# Altium PCB PCB1.PcbDoc
Units mm, origin at the board's own origin, x right, y up, seen from the top; angles counter-clockwise.
Board outline 100 x 100 mm, 2 copper layers (Top Layer, Bottom Layer); 92 components, 60 nets, 300 pads, 62 vias.
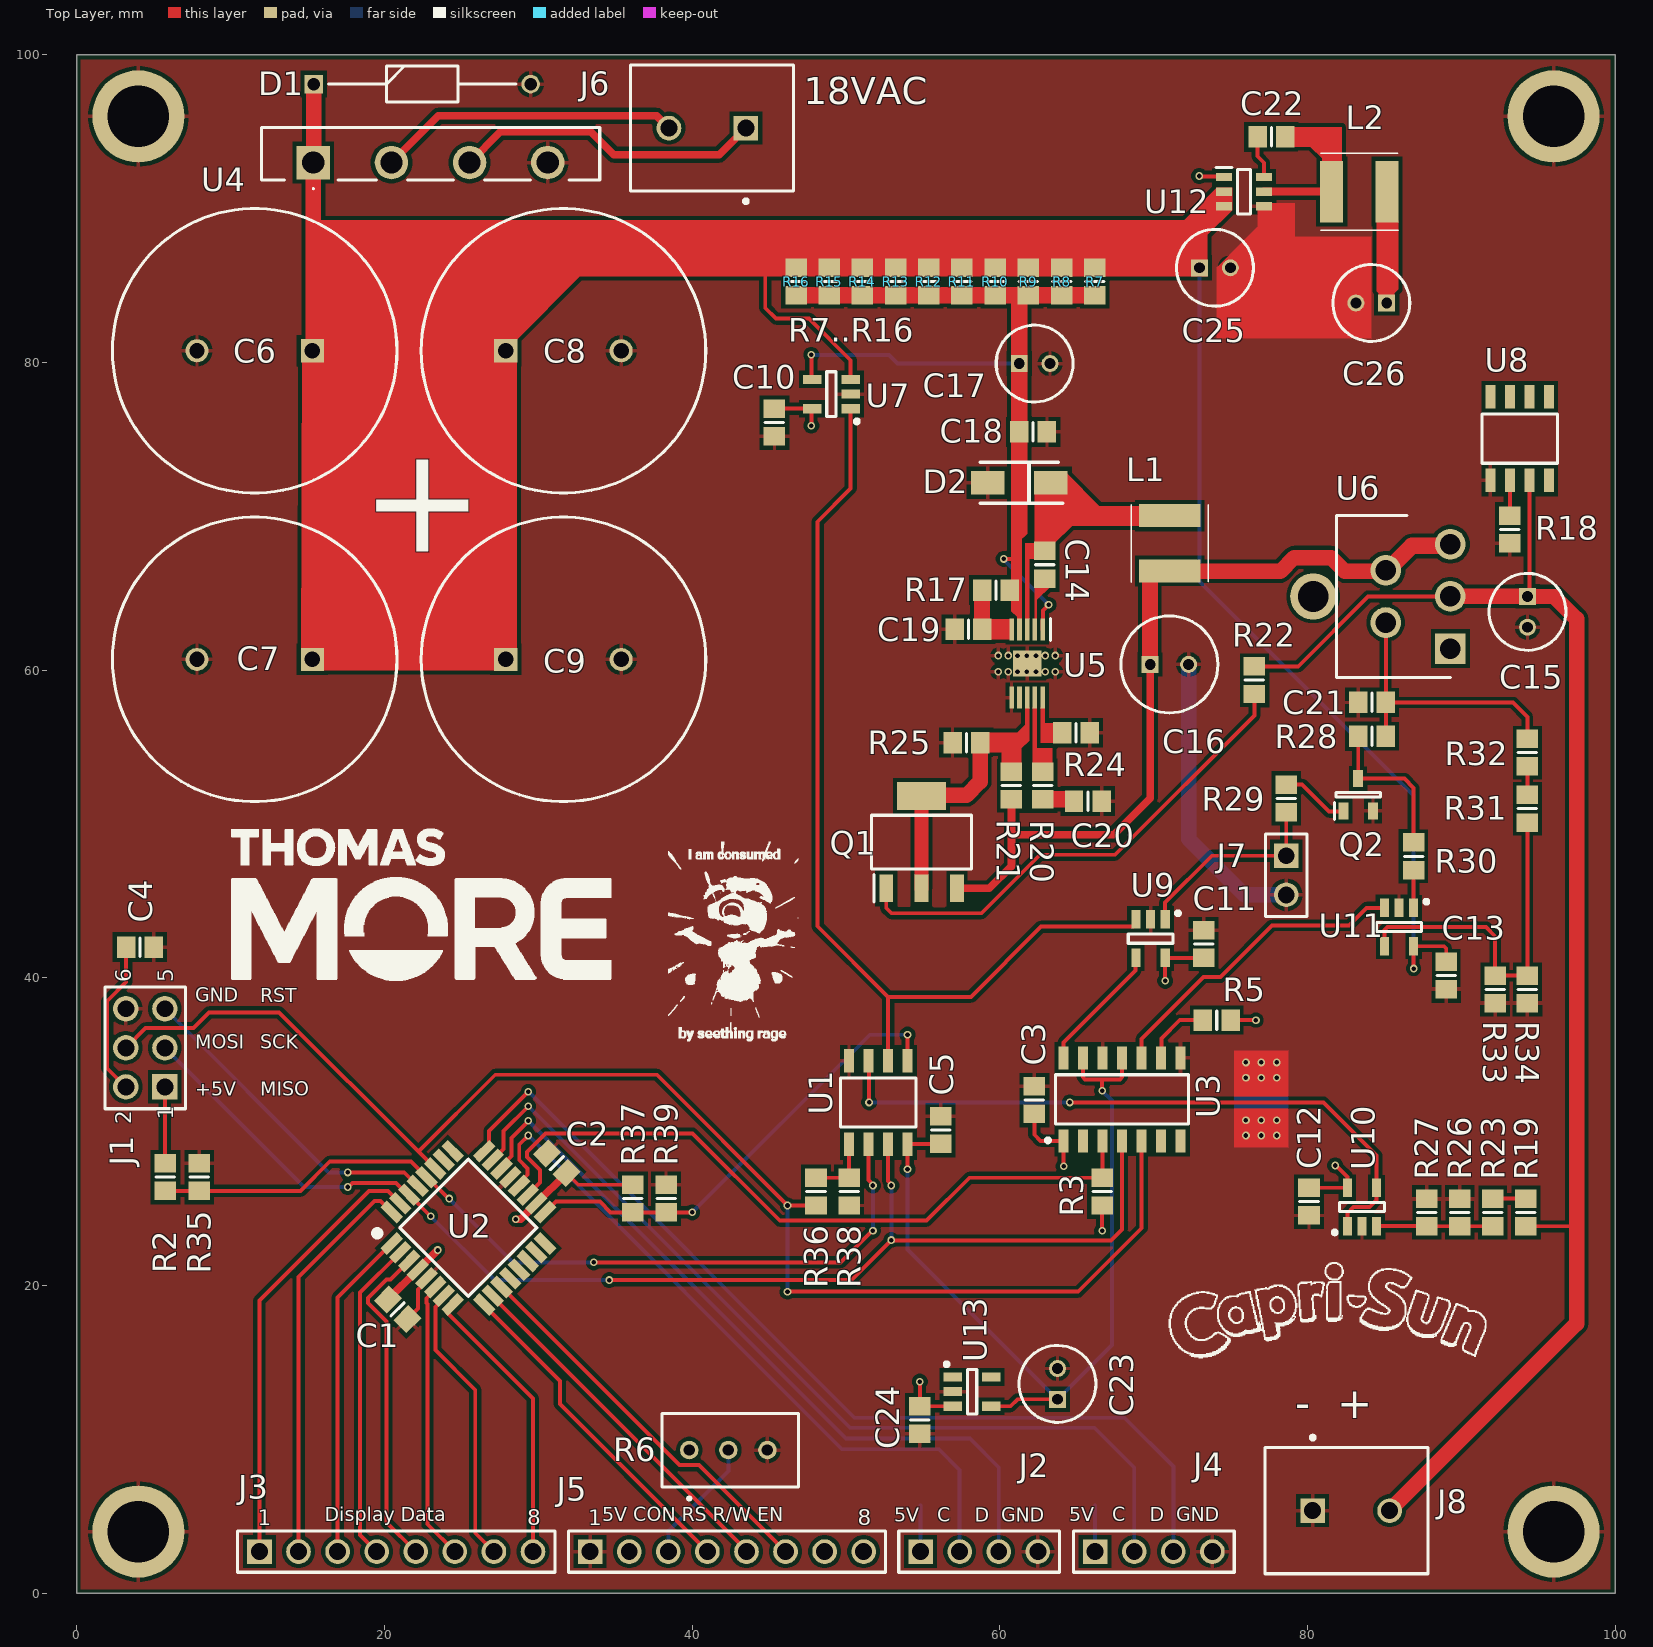
[diagram p0: Top Layer view]
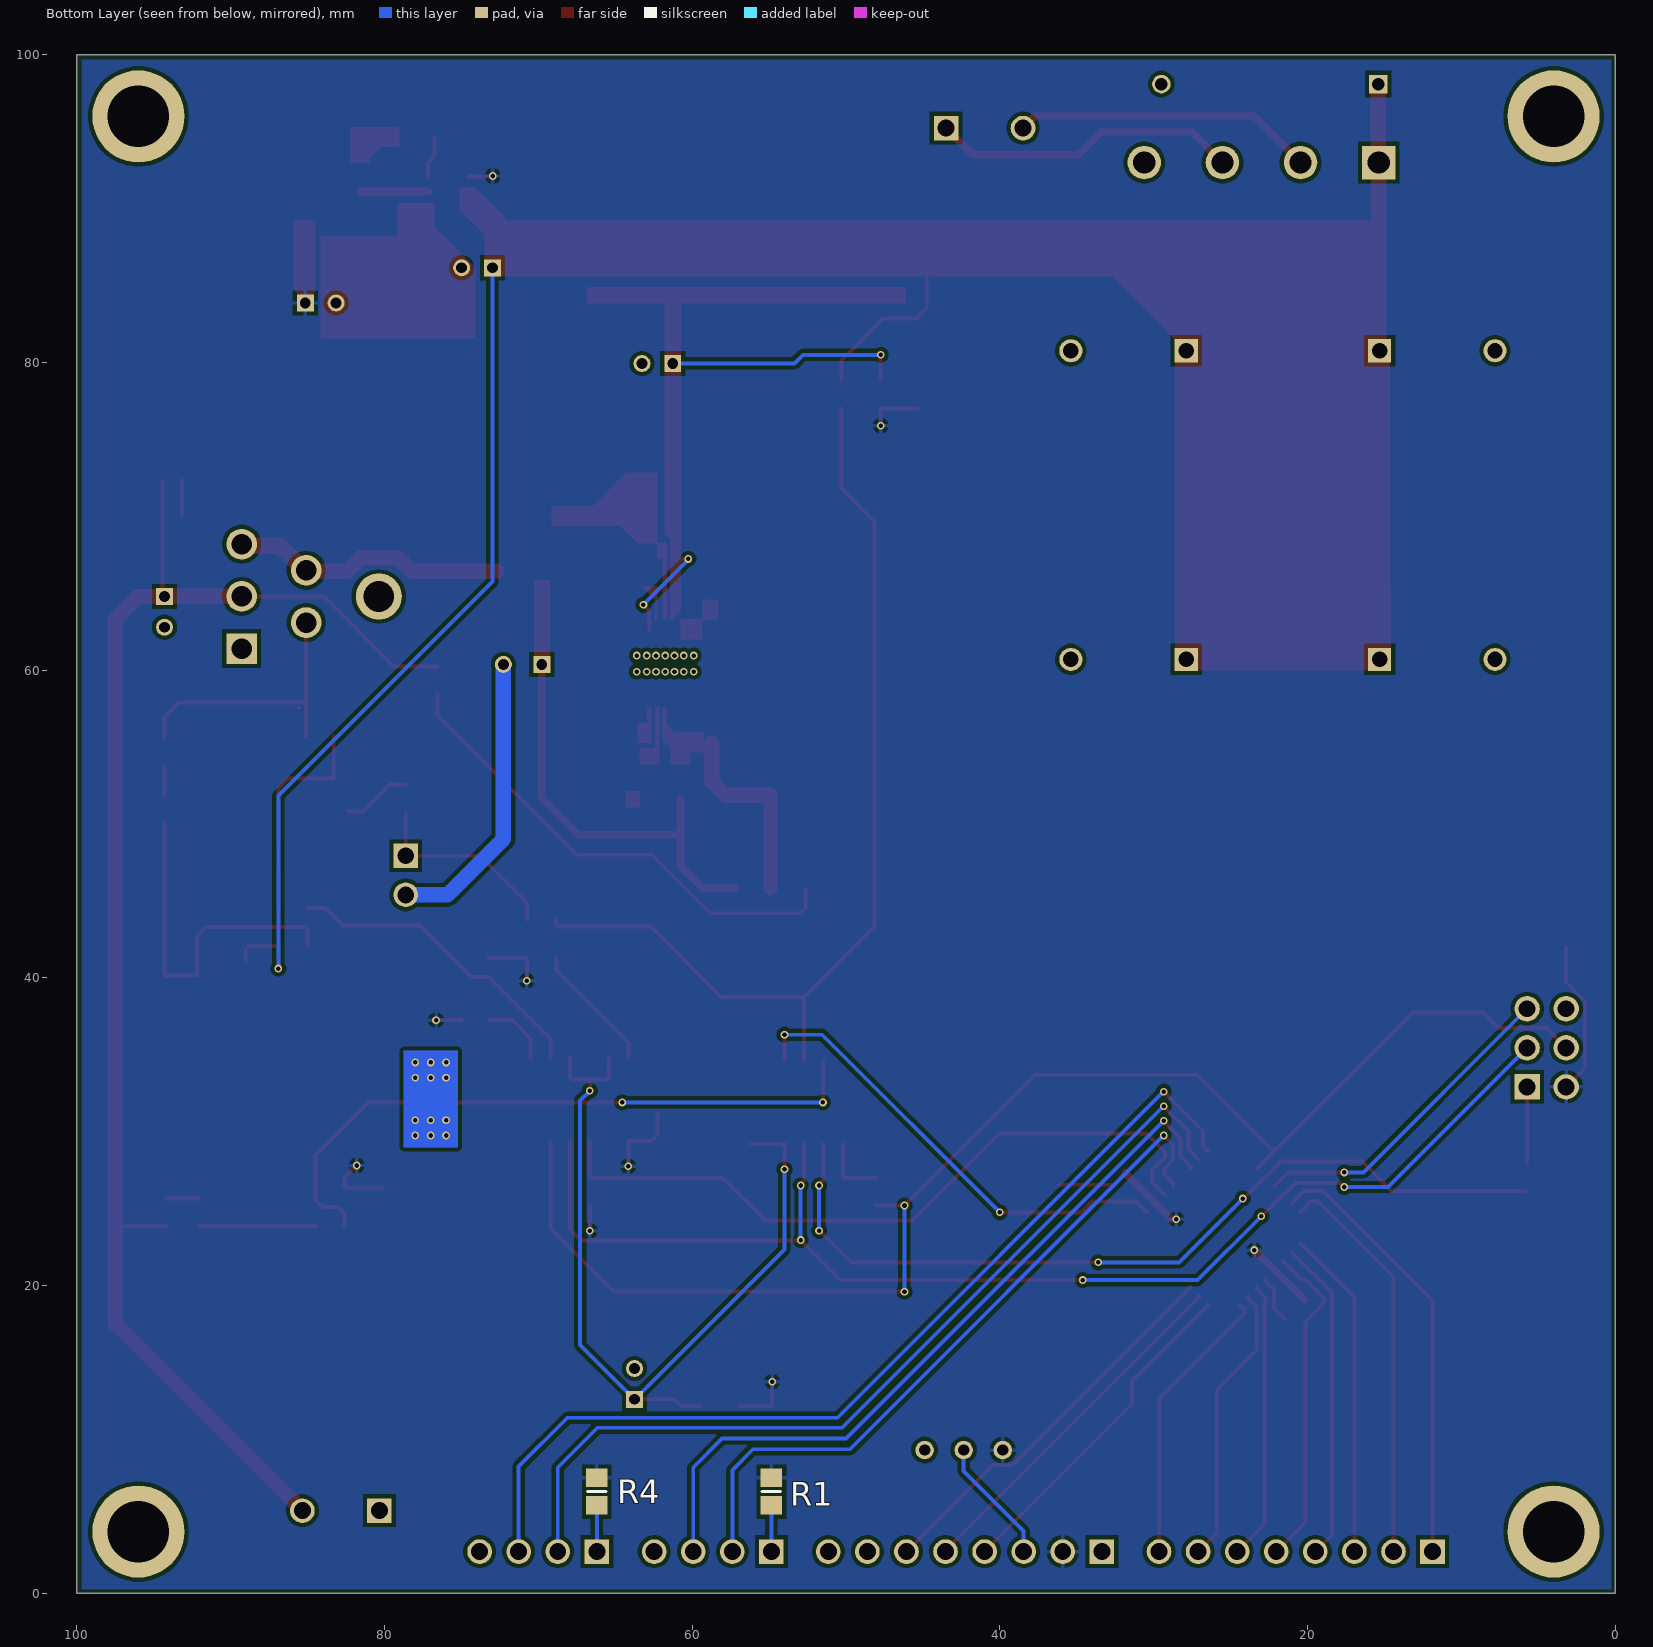
[diagram p1: Bottom Layer view, seen from below]

## Layer stack, top to bottom
Top Solder: solder mask 0.0102, Solder Resist, Dk 3.5
Top Layer: signal copper 0.0356
Dielectric 1: dielectric 0.32, FR-4, Dk 4.8
Bottom Layer: signal copper 0.0356
Bottom Solder: solder mask 0.0102, Solder Resist, Dk 3.5

## Board outline
0,0 0,100 100,100 100,0

## Design rules (kind name [scope] priority, off if disabled: settings)
Clearance [All] p1: gap=0.254 ignorepadtopadclearanceinfootprint=FALSE except(0: Arc-Hole Track-Hole SMDPad-Hole THPad-Hole Via-Hole Fill-Hole Poly-Hole Region-Hole Text-Hole)
HoleSize [All] p1: absolutevalues=TRUE maxlimit=6.3 minlimit=0.3 maxpercent=80.000 minpercent=20.000
PolygonConnect [All] p1: connectstyle=Relief reliefconductorwidth=0.254 reliefentries=4 polygonreliefangle="90 Angle" airgapwidth=0.254
RoutingVias [All] p1: holewidth=0.711 width=1.27 viastyle="Through Hole" minholewidth=0.711 minwidth=1.27 maxholewidth=0.711 maxwidth=1.27
SolderMaskExpansion [All] p1: expansion=0.102 istentingtop=FALSE
Width [All] p1: maxlimit=0.254 minlimit=0.254 preferedwidth=0.254
29 further rules are at their usual default settings.

## Classes and differential pairs
component class 2_PSU: C6 C7 C8 C9 C10 C11 C12 C13 C14 C15 C16 C17 C18 C19 C20 C21 C22 C23 C24 C25 C26 D1 D2 J6 J7 J8 L1 L2 Q1 Q2 R7 R8 R9 R10 R11 R12 R13 R14 R15 R16 R17 R18 R19 R20 R21 R22 R23 R24 R25 R26 R27 R28 R29 R30 R31 R32 R33 R34 U4 U5 U6 U7 U8 U9 U10 U11 U12 U13
component class 1_Controller: C1 C2 C3 C4 C5 J1 J2 J3 J4 J5 R1 R2 R3 R4 R5 R6 R35 R36 R37 R38 R39 U1 U2 U3

## Components (designator, comment, footprint, x,y, rotation, side; value= is the part's Value field where it differs from the comment)
C1 "Capacitor" 6-0805_N 20.85,18.45 r135 top value=100n
C2 "Capacitor" 6-0805_N 31.2,27.95 r315 top value=100n
C3 "Capacitor" 6-0805_N 62.25,32.05 r270 top value=100n
C4 "Capacitor" 6-0805_N 4.1,42 r180 top value=100n
C5 "Capacitor" 6-0805_N 56.15,30.1 r270 top value=100n
C6 "Cap Pol1" CAPPRD750W80D1850H4150 15.308,80.765 r180 top value=4700u
C7 "Cap Pol1" CAPPRD750W80D1850H4150 15.308,60.699 r180 top value=4700u
C8 "Cap Pol1" CAPPRD750W80D1850H4150 27.881,80.765 r0 top value=4700u
C9 "Cap Pol1" CAPPRD750W80D1850H4150 27.881,60.699 r0 top value=4700u
C10 "Capacitor" 6-0805_N 45.35,76.1 r90 top value=100n
C11 "Capacitor" 6-0805_N 73.25,42.2 r270 top value=100n
C12 "Capacitor" 6-0805_N 80.1,25.45 r90 top value=100n
C13 "Capacitor" 6-0805_N 89.025,40.146 r90 top value=100n
C14 "Capacitor" 6-0805_N 62.916,66.852 r270 top value=0.47u
C15 "Cap Pol1" CAPPRD200W52D500H1250 94.304,64.792 r270 top value=10u
C16 "Cap Pol1" CAPPRD250W52D630H1100 69.774,60.375 r0 top value=68u
C17 "Cap Pol1" CAPPRD200W52D500H1250 61.265,79.933 r0 top value=10u
C18 "Capacitor" 6-0805_N 62.165,75.488 r180 top value=1u
C19 "Capacitor" 6-0805_N 57.963,62.661 r0 top value=100n
C20 "Capacitor" 6-0805_N 65.721,51.485 r180 top value=680p
C21 "Capacitor" 6-0805_N 84.2,57.9 r0 top value=100n
C22 "Capacitor" 6-0805_N 77.656,94.667 r180 top value=100n
C23 "Cap Pol1" CAPPRD200W52D500H1250 63.75,12.6 r90 top value=10u
C24 "Capacitor" 6-0805_N 54.8,11.25 r90 top value=100n
C25 "Cap Pol1" CAPPRD200W52D500H1250 72.989,86.158 r0 top value=10u
C26 "Cap Pol1" CAPPRD200W52D500H1250 85.149,83.872 r180 top value=47u
D1 "1N4007" DIOAD1405W58L465D235 15.4,98.1 r0 top
D2 "B340A" DIOM5127X229N 61.265,72.186 r180 top
J1 "61300621121" 61300621121 4.45,35.45 r90 top
J2 "61300411121" 61300411121 58.66,2.7 r0 top
J3 "61300811121" 61300811121 20.76,2.7 r0 top
J4 "61300411121" 61300411121 70.01,2.7 r0 top
J5 "61300811121" 61300811121 42.26,2.7 r0 top
J6 "282836-2" TECO-282836-2_V 40.99,95.24 r180 top
J7 "LED_Header" 61300211121 78.623,46.666 r270 top
J8 "282836-2" TECO-282836-2_V 82.839,5.361 r0 top
L1 "4.7u" VLS5045EX330M 71.044,68.249 r270 top
L2 "4.7u" VLS5045EX330M 83.371,91.111 r0 top
Q1 "ZVP4525GTA" SOT230P700X180-4N 54.915,48.818 r90 top
Q2 "MMBT3904-7-F" SOT96P240X110-3N 83.3,51.9 r90 top
R1 "Resistor" 6-0805_N 54.85,6.6 r90 bottom value=10k
R2 "Resistor" 6-0805_N 5.75,27.05 r270 top value=15.4k
R3 "Resistor" 6-0805_N 66.65,26.1 r270 top value=10k
R4 "Resistor" 6-0805_N 66.2,6.6 r90 bottom value=10k
R5 "Resistor" 6-0805_N 74.1,37.25 r0 top value=10k
R6 "10k" PV36W201C01B00 39.81,9.3 r270 top
R7 "Resistor" 6-0805_N 66.175,85.267 r270 top value=1R
R8 "Resistor" 6-0805_N 64.027,85.267 r270 top value=1R
R9 "Resistor" 6-0805_N 61.857,85.267 r270 top value=1R
R10 "Resistor" 6-0805_N 59.698,85.267 r270 top value=1R
R11 "Resistor" 6-0805_N 57.539,85.267 r270 top value=1R
R12 "Resistor" 6-0805_N 55.38,85.267 r270 top value=1R
R13 "Resistor" 6-0805_N 53.221,85.267 r270 top value=1R
R14 "Resistor" 6-0805_N 51.062,85.267 r270 top value=1R
R15 "Resistor" 6-0805_N 48.903,85.267 r270 top value=1R
R16 "Resistor" 6-0805_N 46.755,85.267 r270 top value=1R
R17 "Resistor" 6-0805_N 59.752,65.201 r0 top value=100k
R18 "Resistor" 6-0805_N 93.15,69.15 r90 top value=68R
R19 "Resistor" 6-0805_N 94.2,24.75 r270 top value=39k
R20 "Resistor" 6-0805_N 62.789,52.501 r90 top value=15.4k
R21 "Resistor" 6-0805_N 60.757,52.501 r270 top value=330k
R22 "Resistor" 6-0805_N 76.55,59.35 r270 top value=10k
R23 "Resistor" 6-0805_N 92.05,24.75 r90 top value=39k
R24 "Resistor" 6-0805_N 64.948,55.93 r180 top value=63.4k
R25 "Resistor" 6-0805_N 57.825,55.295 r0 top value=10k
R26 "Resistor" 6-0805_N 89.9,24.75 r270 top value=39k
R27 "Resistor" 6-0805_N 87.75,24.75 r270 top value=39k
R28 "Resistor" 6-0805_N 84.2,55.7 r0 top value=100R
R29 "Resistor" 6-0805_N 78.623,51.666 r90 top value=10k
R30 "Resistor" 6-0805_N 86.9,47.9 r90 top value=1K
R31 "Resistor" 6-0805_N 94.296,50.996 r270 top value=39k
R32 "Resistor" 6-0805_N 94.296,54.646 r270 top value=39k
R33 "Resistor" 6-0805_N 92.196,39.246 r90 top value=39k
R34 "Resistor" 6-0805_N 94.296,39.246 r90 top value=39k
R35 "Resistor" 6-0805_N 7.95,27.05 r270 top value=63.4k
R36 "Resistor" 6-0805_N 48.05,26.1 r270 top value=15.4k
R37 "Resistor" 6-0805_N 36.15,25.65 r270 top value=15.4k
R38 "Resistor" 6-0805_N 50.2,26.1 r90 top value=63.4k
R39 "Resistor" 6-0805_N 38.3,25.65 r270 top value=63.4k
U1 "MCP3202-BI_SN" SOIC127P600X175-8N 52.1,31.9 r270 top
U2 "ATtiny828" QFP80P900X900X120-32N 25.45,23.75 r45 top
U3 "MCP4922T-E_SL" SOIC127P600X175-14N 67.95,32.1 r90 top
U4 "GBU1010_T0_00601" GBU1010_T0_00601 15.37,93 r180 top
U5 "LT3680EMSE#PBF" SOP50P490X110-11N 61.781,60.428 r270 top
U6 "LT3083ET#PBF" TO170P457X1022X2306-5P 89.289,61.395 r90 top
U7 "INA180-Q1" SOT95P280X145-5N#1 49.05,77.95 r180 top
U8 "LM334SMX_NOPB" SOIC127P600X175-8N 93.8,75.05 r90 top
U9 "TS321ILT" SOT95P280X145-5N#1 69.8,42.55 r270 top
U10 "TS321ILT" SOT95P280X145-5N#1 83.546,25.104 r90 top
U11 "TS321ILT" SOT95P280X145-5N#1 85.95,43.3 r270 top
U12 "AP63205WU-7" SOT95P280X100-6N 75.878,91.111 r0 top
U13 "REF3440SQDBVRQ1" SOT95P280X145-5N#2 58.2,13.1 r0 top

## Footprints (in the part's own frame and the unit in brackets; to place one, negate y for a bottom-side part, rotate by r counter-clockwise, add the part's x,y. Pads: shape width x height; smd on the part's side, far side on the other; paste and mask are expansions set on the pad)
6-0805_N [mm] "Chip Resistor, Body 2.0x1.2mm, IPC Medium Density"
  rect 1.2x1.4 smd: 1(-0.9,0) 2(0.9,0)
  silkscreen extent 0,-0.6 0,0.6, body extent -1.07,-0.7 1.07,0.7, height 0.7
61300211121 [mm] "Pin Header, pitch 2.54 mm, THT, Vertical, single row, 2p"
  rect 1.6x1.6 hole 1.1: 1(-1.27,0)
  round 1.6 hole 1.1: 2(1.27,0)
  silkscreen extent -2.69,-1.35 2.69,1.35, body extent -2.54,-1.27 2.54,1.27, height 8.57
61300411121 [mm] "Pin Header, pitch 2.54 mm, THT, Vertical, single row, 4p"
  rect 1.6x1.6 hole 1.1: 1(-3.81,0)
  round 1.6 hole 1.1: 2(-1.27,0) 3(1.27,0) 4(3.81,0)
  silkscreen extent -5.23,-1.35 5.23,1.35, body extent -5.08,-1.27 5.08,1.27, height 8.57
61300621121 [mm] "Pin Header, pitch 2.54 mm, THT, Vertical, dual row, 6p"
  rect 1.65x1.65 hole 1.1: 1(-2.54,-1.27)
  round 1.65 hole 1.1: 2(-2.54,1.27) 3(0,-1.27) 4(0,1.27) 5(2.54,-1.27) 6(2.54,1.27)
  silkscreen extent -3.96,-2.62 3.96,2.62, body extent -3.81,-2.54 3.81,2.54, height 8.59
61300811121 [mm] "Pin Header, pitch 2.54 mm, THT, Vertical, single row, 8p"
  rect 1.6x1.6 hole 1.1: 1(-8.89,0)
  round 1.6 hole 1.1: 2(-6.35,0) 3(-3.81,0) 4(-1.27,0) 5(1.27,0) 6(3.81,0) 7(6.35,0) 8(8.89,0)
  silkscreen extent -10.31,-1.35 10.31,1.35, body extent -10.16,-1.27 10.16,1.27, height 8.57
CAPPRD200W52D500H1250 [mm]
  rect 1.1x1.1 hole 0.7: 1(0,0)
  round 1.1 hole 0.7: 2(2,0)
  silkscreen extent -1.5,-2.5 3.5,2.5, body extent -1.74,-2.75 3.75,2.75, height 12.5
CAPPRD250W52D630H1100 [mm]
  rect 1.1x1.1 hole 0.7: 1(0,0)
  round 1.1 hole 0.7: 2(2.5,0)
  silkscreen extent -1.9,-3.15 4.4,3.15, body extent -2.14,-3.4 4.65,3.4, height 11
CAPPRD750W80D1850H4150 [mm]
  rect 1.5x1.5 hole 1: 1(0,0)
  round 1.5 hole 1: 2(7.5,0)
  silkscreen extent -5.5,-9.25 13,9.25, body extent -5.48,-9.24 13,9.24, height 41.5
DIOAD1405W58L465D235 [mm]
  rect 1.2x1.2 hole 0.8: 1(0,0)
  round 1.2 hole 0.8: 2(14.1,0)
  silkscreen extent 0.95,-1.17 13.15,1.17, body extent -0.29,-1.34 14.34,1.34, height 2.7
DIOM5127X229N [mm]
  rect 2.2x1.55 smd: 1(-2.05,0) 2(2.05,0)
  silkscreen extent -2.83,-1.33 2.55,1.33, body extent -2.55,-1.33 2.55,1.33, height 2.29
GBU1010_T0_00601 [mm]
  rect 2.175x2.175 hole 1.45: 1(0,0)
  round 2.175 hole 1.45: 2(-5.08,0) 3(-10.16,0) 4(-15.24,0)
  silkscreen extent -18.62,-2.27 3.38,1.75, body extent -18.62,-2.27 3.38,1.13, height 21.65
PV36W201C01B00 [mm]
  round 1.2 hole 0.74: 1(0,0) 2(0,2.54) 3(0,5.08)
  silkscreen extent -2.39,-1.78 3.25,7.11, body extent -2.39,-1.78 2.41,7.11, height 10.13
QFP80P900X900X120-32N [mm]
  rect 1.5x0.6 smd mask+0.05: 1(-4.25,2.8) 2(-4.25,2) 3(-4.25,1.2) 4(-4.25,0.4) 5(-4.25,-0.4) 6(-4.25,-1.2) 7(-4.25,-2) 8(-4.25,-2.8) 17(4.25,-2.8) 18(4.25,-2) 19(4.25,-1.2) 20(4.25,-0.4) 21(4.25,0.4) 22(4.25,1.2) 23(4.25,2) 24(4.25,2.8)
  rect 0.6x1.5 smd mask+0.05: 9(-2.8,-4.25) 10(-2,-4.25) 11(-1.2,-4.25) 12(-0.4,-4.25) 13(0.4,-4.25) 14(1.2,-4.25) 15(2,-4.25) 16(2.8,-4.25) 25(2.8,4.25) 26(2,4.25) 27(1.2,4.25) 28(0.4,4.25) 29(-0.4,4.25) 30(-1.2,4.25) 31(-2,4.25) 32(-2.8,4.25)
  silkscreen extent -4.64,-3.15 3.15,4.14, body extent -4.5,-4.5 4.5,4.5, height 1.2
SOIC127P600X175-8N [mm]
  rect 1.525x0.65 smd: 1(-2.712,1.905) 2(-2.712,0.635) 3(-2.712,-0.635) 4(-2.712,-1.905) 5(2.712,-1.905) 6(2.712,-0.635) 7(2.712,0.635) 8(2.712,1.905)
  silkscreen extent -1.6,-2.45 1.6,2.45, body extent -3,-2.45 3,2.45, height 1.75
SOIC127P600X175-14N [mm]
  rect 1.5x0.65 smd: 1(-2.7,3.81) 2(-2.7,2.54) 3(-2.7,1.27) 4(-2.7,0) 5(-2.7,-1.27) 6(-2.7,-2.54) 7(-2.7,-3.81) 8(2.7,-3.81) 9(2.7,-2.54) 10(2.7,-1.27) 11(2.7,0) 12(2.7,1.27) 13(2.7,2.54) 14(2.7,3.81)
  silkscreen extent -2.79,-4.33 1.6,4.95, body extent -3,-4.33 3,4.33, height 1.75
SOP50P490X110-11N [mm]
  rect 1.425x0.3 smd mask+0.05: 1(-2.212,1) 2(-2.212,0.5) 3(-2.212,0) 4(-2.212,-0.5) 5(-2.212,-1) 6(2.212,-1) 7(2.212,-0.5) 8(2.212,0) 9(2.212,0.5) 10(2.212,1)
  rect 1.68x1.88 smd: 11(0,0)
  silkscreen extent -2.93,1.5 -1.5,1.5, body extent -2.45,-1.5 2.45,1.5, height 1.1
SOT95P280X100-6N [mm]
  rect 1.05x0.55 smd: 1(-1.3,0.95) 2(-1.3,0) 3(-1.3,-0.95) 4(1.3,-0.95) 5(1.3,0) 6(1.3,0.95)
  silkscreen extent -1.83,-1.45 0.43,1.58, body extent -1.4,-1.45 1.4,1.45, height 1
SOT95P280X145-5N#1 [mm]
  rect 1.2x0.6 smd mask+0.05: 1(-1.25,0.95) 2(-1.25,0) 3(-1.25,-0.95) 4(1.25,-0.95) 5(1.25,0.95)
  silkscreen extent -1.78,-1.45 0.3,1.9, body extent -1.4,-1.45 1.4,1.45, height 1.2
SOT95P280X145-5N#2 [mm]
  rect 1.2x0.6 smd: 1(-1.25,0.95) 2(-1.25,0) 3(-1.25,-0.95) 4(1.25,-0.95) 5(1.25,0.95)
  silkscreen extent -1.78,-1.45 0.3,1.9, body extent -1.4,-1.45 1.4,1.45, height 1.2
SOT96P240X110-3N [mm]
  rect 1.1x0.65 smd: 1(-1.05,0.96) 2(-1.05,-0.96) 3(1.05,0)
  silkscreen extent -1.6,-1.45 0.15,1.54, body extent -1.2,-1.45 1.2,1.45, height 1.1
SOT230P700X180-4N [mm]
  rect 1.8x0.9 smd: 1(-3,2.3) 2(-3,0) 3(-3,-2.3)
  rect 1.8x3.2 smd: 4(3,0)
  silkscreen extent -3.9,-3.25 1.75,3.25, body extent -3.5,-3.25 3.5,3.25, height 1.8
TECO-282836-2_V [mm] "Female Header, Pitch 5mm, 1 x 2 Position, Height 10mm"
  rect 1.6x1.6 hole 1.1: 1(-2.5,0)
  round 1.6 hole 1.1: 2(2.5,0)
  silkscreen extent -5.6,-4.1 5,4.87, body extent -5.6,-4.1 5,4.1, height 10
TO170P457X1022X2306-5P [mm]
  rect 1.995x1.995 hole 1.33: 1(0,0)
  round 1.995 hole 1.33: 2(1.7,4.191) 3(3.4,0) 4(5.1,4.191) 5(6.8,0)
  silkscreen extent -1.87,0 8.67,7.4, body extent -1.71,2.83 8.51,7.4, height 21.18
VLS5045EX330M [mm]
  rect 1.5x4 smd: 1(-1.8,0) 2(1.8,0)
  silkscreen extent -2.5,-2.5 2.54,2.5, body extent -2.65,-2.5 2.65,2.5, height 4.35

## Part data
C6 C7 C8 C9 C15 C16 C17 C23 C25 C26: "Polarized Capacitor (Radial)", LatestRevisionDate=17-Jul-2002, LatestRevisionNote="Re-released for DXP Platform.", PackageDescription="Polarized Capacitor (Radial); 2 Leads", PackageReference=RB7.6-15, Published=8-Jun-2000, Publisher="Altium Limited"
D1: "Diode", Manufacturer_Name=Diotec, Mouser Part Number=637-1N4007, Arrow Part Number=1N4007, Arrow Price/Stock=https://www.arrow.com/en/products/1n4007/diotec-semiconductor-ag?region=europe, Datasheet Link=https://diotec.com/tl_files/diotec/files/pdf/datasheets/1n4001.pdf, Manufacturer_Part_Number=1N4007, Mouser Price/Stock=https://www.mouser.co.uk/ProductDetail/Diotec-Semiconductor/1N4007?qs=OlC7AqGiEDmK9mU1uTiCkg%3D%3D
D2: library part B340A-E3_61T, "Diode", Arrow Part Number=B340A-E3/61T, Manufacturer_Name=Vishay, Mouser Part Number=625-BD340A-E3/61T, Arrow Price/Stock=https://www.arrow.com/en/products/b340a-e361t/vishay?region=nac, Datasheet Link=https://ms.componentsearchengine.com/Datasheets/2/B340A-E3_61T.pdf, Height=2.29mm, Manufacturer_Part_Number=B340A-E3/61T, Mouser Price/Stock=https://www.mouser.co.uk/ProductDetail/Vishay-General-Semiconductor/B340A-E3-61T?qs=tdXsjSi%2FIMY4I2dGLbnpzg%3D%3D
J1: library part CMP-1502-01072-1, "THT Vertical Pin Header WR-PHD, Pitch 2.54 mm, Dual Row, 6 pins", Contact Resistance=20mOhm, Manufacturer="Wurth Elektronik", Operating Temperature=-40to105degC, Rated Current=3A, Withstanding Voltage=500VAC, Working Voltage=250VAC, Datasheet URL=https://katalog.we-online.de/em/datasheet/6130xx21121.pdf, Gender=Male, Manufacturer URL=http://www.we-online.de, Mounting Technology=THT, Orientation=Vertical, Package Reference=61300621121, Packaging=Bag, Part Number=61300621121, Pin Number=6, Pitch=2.54mm, Publisher=WurthElektronik, Row Number=Dual
J2 J4: library part CMP-1502-01064-1, "THT Vertical Pin Header WR-PHD, Pitch 2.54 mm, Single Row, 4 pins", Contact Resistance=20mOhm, Manufacturer="Wurth Elektronik", Operating Temperature=-40to105degC, Rated Current=3A, Withstanding Voltage=500VAC, Working Voltage=250VAC, Datasheet URL=https://katalog.we-online.de/em/datasheet/6130xx11121.pdf, Gender=Male, Manufacturer URL=http://www.we-online.de, Mounting Technology=THT, Orientation=Vertical, Package Reference=61300411121, Packaging=Bag, Part Number=61300411121, Pin Number=4, Pitch=2.54mm, Publisher=WurthElektronik, Row Number=Single
J3 J5: library part CMP-1502-01076-1, "THT Vertical Pin Header WR-PHD, Pitch 2.54 mm, Single Row, 8 pins", Contact Resistance=20mOhm, Manufacturer="Wurth Elektronik", Operating Temperature=-40to105degC, Rated Current=3A, Withstanding Voltage=500VAC, Working Voltage=250VAC, Datasheet URL=https://katalog.we-online.de/em/datasheet/6130xx11121.pdf, Gender=Male, Manufacturer URL=http://www.we-online.de, Mounting Technology=THT, Orientation=Vertical, Package Reference=61300811121, Packaging=Bag, Part Number=61300811121, Pin Number=8, Pitch=2.54mm, Publisher=WurthElektronik, Row Number=Single
J6 J8: library part CMP-1684-00017-1, "Female Header, Pitch 5 mm, 1 x 2 Position, Height 10 mm, Tail Length 3.5 mm, Rohs, Bulk", Color=Green, Current=13.5A, Manufacturer="TE Connectivity", Package Description="Female Header, Pitch 5 mm, 1 x 2 Position, Height 10 mm, Tail Length 3.5 mm", Package Reference=THD, Standard Package=300, Voltage=300V, 3D Model=282836-2.pdf, Category=Connectors,Interconnects, Clamp Material - Plating=Brass-NickelPlated, Contact Material - Plating=Brass-TinPlated, Datasheet URL=http://www.te.com.cn/commerce/DocumentDelivery/DDEController?Action=showdoc&DocId=Catalog+Section%7F1308389_EUROSTYLE_TERMINAL_BLOCKS%7F0607%7Fpdf%7FEnglish%7FENG_CS_1308389_EUROSTYLE_TERMINAL_BLOCKS_0607.pdf%7F282836-2, Dynamic Catalog=BuchananSeries, Family=TerminalBlocks-WiretoBoard, Featured Product=EurostyleTerminalBlockConnectors, Features=Interlocking(Side), Housing Material=Polyamide(PA66),Nylon6/6, Manufacturer URL=http://www.te.com, Mating Orientation=HorizontalwithBoard, Mounting Type=ThroughHole, Number of Levels=1, Other Names="5ULV-02B / A98076", Packaging=Bulk, Pitch="0.197\"(5.00mm)", Positions Per Level=2, Product Training Modules=Wire-to-BoardEurostyleTerminalBlocks, RoHS Information=282836-2StatementofCompliance, Screw Material - Plating=Brass-NickelPlated, Screw Thread=M3, Series=Buchanan, Torque - Screw=0.68Nm(6Lb-In), Wire Gauge=16-30AWG, Wire Termination=Screw-RisingCageClamp
J7: library part CMP-1712-00002-4, "THT Vertical Pin Header WR-PHD, Pitch 2.54 mm, Single Row, 2 pins", Contact Resistance=20mOhm, Manufacturer="Wurth Elektronik", Operating Temperature=-40to105degC, Package Reference=61300211121, Rated Current=3A, Withstanding Voltage=500VAC, Working Voltage=250VAC, Datasheet URL=https://katalog.we-online.de/em/datasheet/6130xx11121.pdf, Gender=Male, Manufacturer URL=http://www.we-online.de, Mounting Technology=THT, Orientation=Vertical, Packaging=Bag, Part Number=61300211121, Pin Number=2, Pitch=2.54mm, Publisher=WurthElektronik, Row Number=Single
L1 L2: library part VLS5045EX-4R7M-H, "Inductor", Manufacturer_Name=TDK, Mouser Part Number=810-VLS5045EX-4R7M-H, Arrow Part Number=VLS5045EX-4R7M-H, Arrow Price/Stock=https://www.arrow.com/en/products/vls5045ex-4r7m-h/tdk?region=nac, Datasheet Link=https://product.tdk.com/system/files/dam/doc/product/inductor/inductor/smd/catalog/inductor_automotive_power_vls5045ex-h_en.pdf, Height=4mm, Manufacturer_Part_Number=VLS5045EX-4R7M-H, Mouser Price/Stock=https://www.mouser.co.uk/ProductDetail/TDK/VLS5045EX-4R7M-H?qs=EBDBlbfErPwFg%2FOwn47Q1A%3D%3D
Q1: "MOSFET (P-Channel)", Manufacturer_Name="Diodes Inc.", Mouser Part Number=522-ZVP4525GTA, Arrow Part Number=ZVP4525GTA, Arrow Price/Stock=https://www.arrow.com/en/products/zvp4525gta/diodes-incorporated?region=nac, Datasheet Link=https://www.diodes.com/assets/Datasheets/ZVP4525G.pdf, Height=1.8mm, Manufacturer_Part_Number=ZVP4525GTA, Mouser Price/Stock=https://www.mouser.co.uk/ProductDetail/Diodes-Incorporated/ZVP4525GTA?qs=GedFDFLaBXFR8NEzssRbSQ%3D%3D
Q2: "Transistor BJT NPN", Manufacturer_Name="Diodes Inc.", Mouser Part Number=621-MMBT3904-F, Arrow Part Number=MMBT3904-7-F, Arrow Price/Stock=https://www.arrow.com/en/products/mmbt3904-7-f/diodes-incorporated?region=nac, Datasheet Link=https://www.arrow.com/en/products/mmbt3904-7-f/diodes-incorporated, Height=1.1mm, Manufacturer_Part_Number=MMBT3904-7-F, Mouser Price/Stock=https://www.mouser.co.uk/ProductDetail/Diodes-Incorporated/MMBT3904-7-F?qs=7F%2FY8wl6X3H3eL7tHVWSBQ%3D%3D
R6: library part PV36W104C01B00, "Variable Resistor", Manufacturer_Name=Bourns, Mouser Part Number=81-PV36W104C01B00, Arrow Part Number=PV36W104C01B00, Arrow Price/Stock=https://www.arrow.com/en/products/pv36w104c01b00/bourns?region=nac, Datasheet Link=https://www.bourns.com/docs/Product-Datasheets/pv36.pdf, Height=10.03mm, Manufacturer_Part_Number=PV36W104C01B00, Mouser Price/Stock=https://www.mouser.co.uk/ProductDetail/Bourns/PV36W104C01B00?qs=ifmdR88tEJ9s2DMKM%252Bry%252BA%3D%3D
U1: "Integrated Circuit", Arrow Part Number=MCP3202-BI/SN, Manufacturer_Name=Microchip, Mouser Part Number=579-MCP3202BISN, Arrow Price/Stock=https://www.arrow.com/en/products/mcp3202-bisn/microchip-technology?region=nac, Datasheet Link=https://datasheet.datasheetarchive.com/originals/distributors/Datasheets-19/DSA-360813.pdf, Height=1.75mm, Manufacturer_Part_Number=MCP3202-BI/SN, Mouser Price/Stock=https://www.mouser.co.uk/ProductDetail/Microchip-Technology-Atmel/MCP3202-BI-SN?qs=C%252BuF95oynlkGMhp5%2FSqbew%3D%3D
U2: "Microchip ATtiny828 AVR MCU"
U3: "Undefined or Miscellaneous", Arrow Part Number=MCP4922T-E/SL, Manufacturer_Name=Microchip, Mouser Part Number=579-MCP4922T-E/SL, Arrow Price/Stock=https://www.arrow.com/en/products/mcp4922t-esl/microchip-technology?region=nac, Datasheet Link=http://ww1.microchip.com/downloads/en/DeviceDoc/22250A.pdf, Height=1.75mm, Manufacturer_Part_Number=MCP4922T-E/SL, Mouser Price/Stock=https://www.mouser.co.uk/ProductDetail/Microchip-Technology-Atmel/MCP4922T-E-SL?qs=8U9qMIGhlkqc26Xt7UKk2w%3D%3D
U4: "Bridge Rectifier", Manufacturer_Name=PANJIT, Mouser Part Number=241-GBU1010_T0_00601, Datasheet Link=https://www.panjit.com.tw/upload/datasheet/GBU1010.pdf, Height=21.55mm, Manufacturer_Part_Number=GBU1010_T0_00601, Mouser Price/Stock=https://www.mouser.co.uk/ProductDetail/Panjit/GBU1010_T0_00601?qs=Znm5pLBrcAI2lNvio7iUfQ%3D%3D
U5: "Integrated Circuit", Manufacturer_Name="Analog Devices", Mouser Part Number=584-LT3680EMSE#PBF, Arrow Part Number=LT3680EMSE#PBF, Arrow Price/Stock=https://www.arrow.com/en/products/lt3680emsepbf/analog-devices?region=nac, Datasheet Link=http://cds.linear.com/docs/en/datasheet/3680fb.pdf, Height=1.1mm, Manufacturer_Part_Number=LT3680EMSE#PBF, Mouser Price/Stock=https://www.mouser.co.uk/ProductDetail/Analog-Devices/LT3680EMSEPBF?qs=hVkxg5c3xu84NF9L1FMYWA%3D%3D
U6: "Integrated Circuit", Manufacturer_Name="Analog Devices", Mouser Part Number=584-LT3083ET#PBF, Arrow Part Number=LT3083ET#PBF, Arrow Price/Stock=https://www.arrow.com/en/products/lt3083etpbf/linear-technology, Datasheet Link=http://www.linear.com/docs/30239, Height=4.572mm, Manufacturer_Part_Number=LT3083ET#PBF, Mouser Price/Stock=https://www.mouser.co.uk/ProductDetail/Analog-Devices/LT3083ETPBF?qs=hVkxg5c3xu%252BEQibxnmC0QQ%3D%3D
U7: "Current Sense Amplifier"
U8: "Integrated Circuit", Arrow Part Number=LM334SMX/NOPB, Manufacturer_Name="Texas Instruments", Mouser Part Number=926-LM334SMX/NOPB, Arrow Price/Stock=https://www.arrow.com/en/products/lm334smxnopb/texas-instruments?region=nac, Datasheet Link=http://www.ti.com/lit/gpn/LM334, Height=1.75mm, Manufacturer_Part_Number=LM334SMX/NOPB, Mouser Price/Stock=https://www.mouser.co.uk/ProductDetail/Texas-Instruments/LM334SMX-NOPB?qs=X1J7HmVL2ZF1HSorCNkgVw%3D%3D
U9 U10 U11: "Integrated Circuit", Manufacturer_Name=STMicroelectronics, Mouser Part Number=511-TS321IL, Arrow Part Number=TS321ILT, Arrow Price/Stock=https://www.arrow.com/en/products/ts321ilt/stmicroelectronics?region=europe, Datasheet Link=http://www.st.com/st-web-ui/static/active/en/resource/technical/document/datasheet/CD00001647.pdf, Height=1.45mm, Manufacturer_Part_Number=TS321ILT, Mouser Price/Stock=https://www.mouser.co.uk/ProductDetail/STMicroelectronics/TS321ILT?qs=AYLkW%2FmgjI3DImBJVY6kBw%3D%3D
U12: "Integrated Circuit", Manufacturer_Name="Diodes Inc.", Mouser Part Number=621-AP63205WU-7, Arrow Part Number=AP63205WU-7, Arrow Price/Stock=https://www.arrow.com/en/products/ap63205wu-7/diodes-incorporated?region=europe, Datasheet Link=https://www.diodes.com/assets/Datasheets/AP63200-AP63201-AP63203-AP63205.pdf, Height=1mm, Manufacturer_Part_Number=AP63205WU-7, Mouser Price/Stock=https://www.mouser.co.uk/ProductDetail/Diodes-Incorporated/AP63205WU-7?qs=u16ybLDytRZtkj8PzdWCOw%3D%3D
U13: "Integrated Circuit", Manufacturer_Name="Texas Instruments", Mouser Part Number=595-REF3440SQDBVRQ1, Arrow Part Number=REF3440SQDBVRQ1, Arrow Price/Stock=https://www.arrow.com/en/products/ref3440sqdbvrq1/texas-instruments?region=nac, Datasheet Link=https://www.ti.com/lit/gpn/REF34-Q1, Height=1.45mm, Manufacturer_Part_Number=REF3440SQDBVRQ1, Mouser Price/Stock=https://www.mouser.co.uk/ProductDetail/Texas-Instruments/REF3440SQDBVRQ1?qs=bAKSY%2FctAC6om7nW8LpN%2Fg%3D%3D
C1 C2 C3 C4 C5 C10 C11 C12 C13 C14 C18 C19 C20 C21 C22 C24: SimulationGenericComponent=True
R1 R2 R3 R4 R5 R7 R8 R9 R10 R11 R12 R13 R14 R15 R16 R17 R18 R19 R20 R21 R22 R23 R24 R25 R26 R27 R28 R29 R30 R31 R32 R33 R34 R35 R36 R37 R38 R39: SimulationGenericComponent=True, TC1=0, TC2=0

## Free pads (board coordinates)
  round 3 hole 2: HS(80.37,64.79)
  round 6 hole 4: MH(4,4) MH(4,96) MH(96,4) MH(96,96)

## Via types
v1: diameter 0.5, hole 0.3, Top Layer to Bottom Layer, 60 vias
v2: diameter 0.5, hole 0.3, Top Layer to Bottom Layer, tented both sides, 2 vias

## Nets (pads, with @x,y where several pads share a name; then routed paths per layer and width w, separated by ;. In a path a pad name is that pad's centre, name@x,y a point inside that pad or via, vN(x,y) a via of type N, cw(c..) or ccw(c..) an arc to the next point about the centre after c; other vN are vias at no path point)
+4.096V: C5.2 C23.1 U1.8 U3.11 U3.13 U13.4 | length 55
  Top Layer w0.254: v1(54,27.55) 54.003,27.553 54.003,29.185 U1.8 54.017,29.2 C5.2 ; U13.4 60.7,12.15 61.15,12.6 C23.1 ; U3.13 65.4,34.79 65.4,33.549 65.549,33.4 66.674,33.4 ; v1(66.65,32.65) 66.65,33.376 66.674,33.4 ; U3.11 67.95,33.55 67.8,33.4 66.674,33.4
  Bottom Layer w0.254: v1(54,27.55) 54,22.35 C23.1 67.281,16.131 67.281,32.019 v1(66.65,32.65)
+5V: C1.2 C2.2 C3.2 C4.2 C10.2 C11.2 C12.2 C24.2 C26.1 J1.2 J5.2 L2.2 R1.2 R3.2 R4.2 R5.2 R6.1 R37.1 U2.4 U2.18 U3.1 U7.5 U9.5 U10.5 U12.1 U13.3 | length 49.5
  Top Layer w0.254: J1.2 1.974,34.116 1.974,38.49 3.2,39.716 C4.2 ; C1.2 C1.2@20.221,19.086 ; U2.4 U2.4@22.17,21.028 ; v1@23.442,22.3 v1(23.45,22.3) ; U2.18@29.869,25.33 U2.18 ; C2.2@31.836,27.308 32.594,26.55 R37.1 ; C10.2@45.346,77.004 C10.2 U7.5 47.75,76.95 v1(47.75,75.9) ; v1(54.8,13.75) C24.2 U13.3 ; C3.2 62.25,29.8 62.65,29.4 U3.1 64.145,29.395 64.145,27.755 v1(64.15,27.75) ; v1(66.65,23.55) R3.2 ; v1(70.75,39.8) U9.5 C11.2 ; v1(72.957,92.127) 72.99,92.094 74.545,92.094 U12.1 ; R5.2 v1(76.65,37.25) ; C12.2 82.592,26.35 U10.5 82.6,26.358 82.6,27.05 81.85,27.8 v1(81.8,27.8)
  Top Layer w0.5: C1.2@20.221,19.086 U2.4 ; U2.4@22.17,21.028 v1@23.442,22.3 ; v1(28.523,24.308) 28.847,24.308 29.521,24.982 U2.18@29.869,25.33 ; U2.18 C2.2@31.836,27.308
ADC_CURRENT: U1.2 U7.1 U9.3 | length 63.6
  Top Layer w0.254: U7.1 50.3,71.8 48.15,69.65 48.15,43.35 52.735,38.765 ; U1.2 52.735,38.765 ; U9.3 68.85,43.5 68.677,43.327 62.677,43.327 58.115,38.765 52.735,38.765
ADC_VOLTAGE: U1.3 U10.1 U10.4 | length 43.2
  Top Layer w0.254: U1.3 51.483,34.595 51.483,31.918 v1(51.5,31.9) ; v1(64.55,31.9) 81.05,31.9 84.5,28.45 84.5,26.354 84.5,25.55 84.05,25.1 83,25.1 82.596,24.696 U10.1
  Bottom Layer w0.254: v1(51.5,31.9) v1(64.55,31.9)
CS_ADC: R37.2 R39.2 U1.1 U2.17 | length 30.6
  Top Layer w0.254: U2.17 30.475,24.775 31.15,25.45 34,25.45 34.7,24.75 R37.2 R39.2 v1(40,24.75) ; v1(54,36.3) 54.003,36.298 54.003,34.615 U1.1
  Bottom Layer w0.254: v1(40,24.75) 51.55,36.3 v1(54,36.3)
CS_DAC: R3.1 U2.19 U3.3 | length 47.2
  Top Layer w0.254: U2.19 30.103,26.706 30.103,27.518 29.263,28.358 29.263,28.674 30.477,29.887 40.026,29.887 45.694,24.219 55.244,24.219 58.025,27 R3.1 66.68,27.03 U3.3
DAC_CURRENT: U3.14 U9.4 | length 8.5
  Top Layer w0.254: U3.14 64.15,34.81 64.15,35.8 68.818,40.468 68.818,41.268 U9.4
DAC_VOLTAGE: U3.10 U11.3 | length 20.5
  Top Layer w0.254: U3.10 69.22,36.02 73.25,40.05 74.35,40.05 77.7,43.4 82.7,43.4 83.85,44.55 U11.3
DisplayData0: J3.1 U2.31 | length 28.8
  Top Layer w0.254: J3.1 11.87,19.02 19,26.15 20.222,26.15 U2.31
DisplayData1: J3.2 U2.32 | length 26.3
  Top Layer w0.254: J3.2 14.41,20.56 19.35,25.5 19.74,25.5 U2.32
DisplayData2: J3.3 U2.1 | length 21.5
  Top Layer w0.254: J3.3 16.95,19.21 U2.1
DisplayData3: J3.4 U2.2 | length 21
  Top Layer w0.254: J3.4 18.405,3.785 18.405,19.534 U2.2
DisplayData4: J3.5 U2.3 | length 21.4
  Top Layer w0.254: U2.3 20.39,20.387 20.126,20.387 18.913,19.173 18.913,18.858 20.126,17.645 20.126,4.604 J3.5
DisplayData5: J3.6 U2.6 | length 18.2
  Top Layer w0.254: U2.6 23.293,19.728 22.736,19.17 22.736,18.855 22.793,18.797 22.793,4.477 J3.6
DisplayData6: J3.7 U2.7 | length 18.4
  Top Layer w0.254: U2.7 23.859,19.162 23.301,18.605 23.301,15.799 25.9,13.2 25.9,3.91 J3.7
DisplayData7: J3.8 U2.8 | length 18.5
  Top Layer w0.254: U2.8 24.106,18.447 24.106,18.202 29.65,12.659 J3.8
EN: J5.6 U2.11 | length 25.6
  Top Layer w0.254: U2.11 39.184,8.319 40.451,8.319 J5.6
GND: C1.1 C2.1 C3.1 C4.1 C5.1 C6.2 C7.2 C8.2 C9.2 C10.1 C11.1 C12.1 C13.1 C15.2 C16.2 C17.2 C18.1 C19.1 C20.1 C21.1 C23.2 C24.1 C25.2 C26.2 D1.2 D2.2 J1.6 J2.4 J4.4 J5.1 J7.2 J8.1 pad.MH Q2.2 R6.3 R18.1 R24.1 R25.1 R26.1 R27.1 R33.1 R34.1 R35.1 R38.1 R39.1 U1.4 U2.5 U2.21 U3.8 U3.12 U4.4 U5.6 U5.11 U7.2 U8.1 U9.2 U10.2 U11.2 U12.4 U13.2 | length 22.4
  Top Layer w0.254: C1.1 22.17,18.497 22.17,19.736 22.728,20.294 U2.5
  Bottom Layer w1: C16.2 72.274,49.026 75.904,45.396 J7.2
  other v1: 76,29.75 77,29.75 78,29.75 76,30.75 77,30.75 78,30.75 76,33.5 77,33.5 78,33.5 76,34.5 77,34.5 78,34.5 59.9,59.9 60.55,59.9 61.15,59.9 61.75,59.9 62.35,59.9 62.95,59.9 63.6,59.9 59.9,60.95 60.55,60.95 61.15,60.95 61.75,60.95 62.35,60.95 62.95,60.95 63.6,60.95
INPUT: C6.1 C7.1 C8.1 C9.1 C13.2 C25.1 D1.1 R7.1 R8.1 R9.1 R10.1 R11.1 R12.1 R13.1 R14.1 R15.1 R16.1 U4.1 U7.3 U11.5 U12.2 U12.3 | length 84
  Top Layer w0.254: C6.1 C6.1@15.37,80.827 ; U4.1 U4.1@15.4,93.03 ; 44.75,85.85 44.75,83.55 45.45,82.85 47.6,82.85 50.3,80.15 U7.3 ; R7.1 R7.1@66.408,86.4 ; v1(86.9,40.6) U11.5 88.876,42.05 89.025,41.901 C13.2
  Top Layer w1: C6.1@15.37,80.827 U4.1 ; U4.1@15.4,93.03 D1.1
  Bottom Layer w0.254: C25.1 72.989,65.761 86.9,51.85 v1(86.9,40.6)
MISO: R2.2 R35.2 U1.6 U2.28 | length 56.1
  Top Layer w0.254: R2.2 R35.2 14.539,26.15 16.439,28.05 21.716,28.05 U2.28 22.77,27.038 24.158,25.65 v1(24.2,25.65) ; v1(33.605,21.504) 49.637,21.504 51.683,23.55 v1(51.75,23.55) ; U1.6 51.465,26.852 51.75,26.567 v1(51.75,26.5)
  Bottom Layer w0.254: v1(24.2,25.65) 28.346,21.504 v1(33.605,21.504) ; v1(51.75,23.55) v1(51.75,26.5)
MOSI: J1.4 R36.2 U2.27 U3.5 | length 92.7
  Top Layer w0.254: J1.4 4.464,36.734 7.584,36.734 8.6,37.75 13.147,37.75 22.199,28.699 ; U2.27 22.199,28.699 ; v1(46.2,19.6) 65.1,19.6 69.22,23.72 U3.5 ; R36.2 v1(46.2,25.2) 37.7,33.7 27.2,33.7 22.199,28.699
  Bottom Layer w0.254: v1(46.2,19.6) v1(46.2,25.2)
NetC14_1: C14.1 D2.1 L1.1 U5.3
NetC14_2: C14.2 U5.2
NetC16_1: C16.1 L1.2 Q1.3 R21.2 U6.4 U6.5 | length 45.3
  Top Layer w0.254: Q1.3@57.201,45.804 Q1.3 ; 60.757,49.429 60.886,49.3 ; U6.4@85.069,66.424 U6.4@85.098,66.395 ; U6.5@89.269,68.075 U6.5@89.289,68.095
  Top Layer w0.5: Q1.3 59.318,45.818 60.757,47.257 60.757,49.429 R21.2 ; 60.886,49.3 67.4,49.3 69.774,51.674 C16.1
  Top Layer w1: L1.2@72.7,66.424 78.24,66.424 79.129,67.313 81.542,67.313 82.431,66.424 U6.4@85.069,66.424
  Top Layer w1.07: U6.4@85.098,66.395 86.778,68.075 U6.5@89.269,68.075
NetC19_2: C19.2 R17.1 U5.5
NetC20_2: C20.2 R20.1
NetC21_2: C21.2 R28.2 R32.1 U6.2 | length 18.4
  Top Layer w0.254: U6.2 85.098,57.902 C21.2 ; R28.2 C21.2 ; C21.2@85.548,57.559 C21.2@85.559,57.548 ; R32.1 94.3,55.55 94.3,56.95 93.35,57.9 C21.2
NetC22_1: C22.1 L2.1 U12.5 | length 4.4
  Top Layer w0.508: U12.5 L2.1
NetC22_2: C22.2 U12.6 | length 2.8
  Top Layer w0.254: C22.2 76.756,93.408 77.178,92.986 U12.6
NetJ1_1: J1.1 R2.1 | length 5
  Top Layer w0.254: J1.1 5.72,27.98 R2.1
NetJ2_1: J2.1 R1.1 | length 3
  Bottom Layer w0.254: J2.1 R1.1
NetJ2_2: J2.2 U2.20 | length 46.3
  Top Layer w0.254: U2.20 28.738,26.641 29.296,27.198 29.296,27.607 28.755,28.147 28.755,29.155 v1(29.35,29.75)
  Bottom Layer w0.254: v1(29.35,29.75) 49.75,9.35 56.05,9.35 57.39,8.01 J2.2
NetJ2_3: J2.3 U2.22 | length 49.2
  Top Layer w0.254: U2.22 27.607,27.772 28.247,28.413 28.247,29.597 v1(29.35,30.7)
  Bottom Layer w0.254: v1(29.35,30.7) 50,10.05 58.05,10.05 59.93,8.17 J2.3
NetJ4_1: J4.1 R4.1 | length 3
  Bottom Layer w0.254: J4.1 R4.1
NetJ4_2: J4.2 U2.23 | length 59
  Top Layer w0.254: U2.23 27.739,28.868 27.739,30.039 v1(29.35,31.65)
  Bottom Layer w0.254: v1(29.35,31.65) 50.25,10.75 66.15,10.75 68.74,8.16 J4.2
NetJ4_3: J4.3 U2.24 | length 62.6
  Top Layer w0.254: U2.24 26.794,29.053 26.794,30.044 v1(29.35,32.6)
  Bottom Layer w0.254: v1(29.35,32.6) 50.55,11.4 68.1,11.4 71.28,8.22 J4.3
NetJ5_3: J5.3 R6.2 | length 8.2
  Bottom Layer w0.254: J5.3 38.45,4.05 42.35,7.95 R6.2
NetJ6_1: J6.1 U4.3 | length 20.2
  Top Layer w0.254: J6.1 J6.1@43.53,95.2
  Top Layer w0.5: U4.3 27.53,95 33.4,95 34.9,93.5 41.75,93.5 J6.1
NetJ6_2: J6.2 U4.2 | length 19.6
  Top Layer w0.5: U4.2 23.5,96.05 37.68,96.05 J6.2
NetJ7_1: J7.1 R29.1 U9.1 | length 13.1
  Top Layer w0.254: U9.1 70.75,44.9 73.786,47.936 J7.1 R29.1
NetQ1_1: Q1.1 R22.2 | length 32.1
  Top Layer w0.254: Q1.1 52.615,44.535 52.95,44.2 58.8,44.2 62.6,48 67.5,48 76.55,57.05 R22.2 R22.2@76.564,58.436
NetQ1_2: Q1.2 Q1.4 R21.1 R25.2 U5.8 | length 12.7
  Top Layer w0.254: Q1.4 Q1.4@54.963,51.866
  Top Layer w0.9: Q1.2 Q1.4
  Top Layer w1: Q1.4@54.963,51.866 57.836,51.866 58.725,52.755 R25.2
NetQ2_1: Q2.1 R29.2 | length 4.5
  Top Layer w0.254: R29.2 79.634,52.566 81.4,50.8 82.29,50.8 Q2.1
NetQ2_3: Q2.3 R28.1 R30.2 | length 10.1
  Top Layer w0.254: R28.1 Q2.3 86.3,52.95 86.9,52.35 R30.2
NetR5_1: R5.1 U3.9 | length 4.5
  Top Layer w0.254: U3.9 70.5,34.81 70.5,36.05 71.7,37.25 R5.1
NetR18_2: R18.2 U8.2 | length 2.3
  Top Layer w0.254: R18.2 93.165,70.065 U8.2
NetR19_1: R19.1 R23.2 | length 2.2
  Top Layer w0.254: R23.2 R19.1
NetR20_2: R20.2 U5.9
NetR23_1: R23.1 R26.2 R27.2 U10.3 | length 7.6
  Top Layer w0.254: U10.3 87.746,23.854 R27.2 R26.2 R23.1
NetR24_2: R24.2 U5.10
NetR30_1: R30.1 U11.1 | length 2.5
  Top Layer w0.254: U11.1 R30.1
NetR31_1: R31.1 R32.2 | length 1.8
  Top Layer w0.254: R31.1 R32.2
NetR31_2: R31.2 R33.2 R34.2 U11.4 | length 23.2
  Top Layer w0.254: U11.4 85,43.1 85.2,43.3 91.6,43.3 92.2,42.7 92.2,40.15 R33.2 R34.2 R31.2
NetR36_1: R36.1 R38.2 U1.5 | length 4.3
  Top Layer w0.254: R36.1 R38.2 50.195,27.005 U1.5
OUTPUT: C15.1 J8.2 R19.2 R22.1 U6.3 U8.3 | length 97.3
  Top Layer w0.254: R22.1 79.4,60.25 83.945,64.795 U6.3 ; R19.2 97.5,23.85 ; C15.1 94.435,64.922 U8.3
  Top Layer w1: J8.2 97.5,17.522 97.5,23.85 97.5,63.334 96.042,64.792 C15.1 ; U6.3 C15.1@94.301,64.795
  Bottom Layer w0.254: C15.1@94.301,64.795 C15.1
R/W: J5.5 U2.10 | length 23.5
  Top Layer w0.254: U2.10 27.041,19.26 43.53,2.771 J5.5
RESET: J1.5 U2.29 | length 21.2
  Top Layer w0.254: v1(17.6,27.35) 21.284,27.35 U2.29
  Bottom Layer w0.254: J1.5 16.36,27.35 v1(17.6,27.35)
RS: J5.4 U2.9 | length 22.1
  Top Layer w0.254: U2.9 26.475,18.725 31.4,13.801 31.4,12.29 J5.4
SCK: J1.3 U1.7 U2.30 U3.4 | length 82.2
  Top Layer w0.254: v1(17.6,26.4) 17.667,26.4 17.925,26.658 20.748,26.658 21.499,25.907 U2.30 v1(23,24.5) v1(23,24.5) ; v1(34.6,20.35) 50.35,20.35 v1(52.95,22.95) 52.981,22.919 67.219,22.919 67.95,23.65 U3.4 ; U1.7 52.735,26.782 52.95,26.567 v1(52.95,26.5)
  Bottom Layer w0.254: J1.3 14.77,26.4 v1(17.6,26.4) ; v1(23,24.5) 27.15,20.35 v1(34.6,20.35) ; v1(52.95,22.95) v1(52.95,26.5)
SHUNT_NEG: C17.1 C18.2 R7.2 R8.2 R9.2 R10.2 R11.2 R12.2 R13.2 R14.2 R15.2 R16.2 R17.2 U5.1 U5.4 U7.4 | length 22.2
  Top Layer w0.254: R16.2@46.682,84.294 R16.2 ; v1(47.75,80.5) 47.75,78.95 U7.4 ; v2(60.249,67.233) 61.011,67.233 ; U5.1 62.781,63.203 62.804,63.226 62.804,63.879 v2(63.17,64.245) ; R7.2 R7.2@66.192,84.35
  Bottom Layer w0.254: v1(47.75,80.5) 52.8,80.5 53.35,79.95 61.248,79.95 C17.1 ; v2(60.249,67.233) 60.249,67.2 63.17,64.279 v2(63.17,64.245)
pads on no net: J5.7 J5.8 U2.12 U2.13 U2.14 U2.15 U2.16 U2.25 U2.26 U3.2 U3.6 U3.7 U5.7 U6.1 U8.4 U8.5 U8.6 U8.7 U8.8 U13.1 U13.5

## Polygon pours and split planes (outlines as drawn)
+5V on Bottom Layer "+5V_L02_P000" (solid, pour order 0): 0.254,0.254 99.695,0.254 99.695,99.695 0.254,99.695
GND on Top Layer "GND_L01_P001" (solid, pour order 1): 0.254,0.254 99.695,0.254 99.695,99.695 0.254,99.695

## Other copper
Top Layer:
  region net GND: 78.75,35.25 75.25,35.25 75.25,32.3 78.75,32.3
  region net GND: 75.25,31.5 78.75,31.5 78.75,29 75.25,29
  region net INPUT: 74.1,91.35 71.05,88.3 73.5,88.3 75.1,89.9 75.1,91.35
  region net INPUT: 28.55,81.45 32.7,85.6 73.5,85.6 73.5,89.25 15.85,89.25 15.8,89.2 15.8,81.4
  region net NetR24_2: 62.916,57.581 62.662,57.581 62.662,55.295 63.551,55.295 63.551,56.565 62.916,56.565
  region net NetQ1_2: 59.233,55.93 61.265,55.93 60.249,54.914 60.249,54.66 59.233,54.66
  region net NetQ1_2: 61.9,57.581 61.9,55.422 61.392,54.914 61.392,53.898 60.122,53.898 60.122,54.914 61.646,56.438 61.646,57.581
  region net NetR20_2: 62.154,57.581 62.154,53.898 63.424,53.898 63.424,54.914 62.408,54.914 62.408,57.581
  region net NetC19_2: 60.757,63.296 59.36,63.296 59.36,62.026 60.757,62.026
  region net NetC20_2: 63.424,52.12 64.313,52.12 64.313,51.104 63.424,51.104
  region net NetC19_2: 59.36,64.566 59.36,63.296 58.344,63.296 58.344,64.566
  region net NetC14_1: 62.281,68.249 63.551,68.249 64.694,69.392 69.139,69.392 69.139,70.662 66.472,70.662 64.313,72.821 62.281,72.821 62.281,71.678
  region net NetC14_1: 61.9,63.296 61.9,67.233 62.281,67.233 62.281,68.249 61.646,68.249 61.646,63.296
  region net NetC14_2: 62.408,63.296 62.408,64.566 63.297,65.455 62.281,65.455 62.281,63.296
  region net SHUNT_NEG: 61.431,63.296 61.431,83.997 60.757,83.997 60.757,63.843 61.131,63.469 61.131,63.296
  region net SHUNT_NEG: 61.265,68.376 61.773,68.884 61.773,84.05 61.265,84.05
  region net NetC16_1: 69.266,59.867 69.266,65.836 70.282,65.836 70.282,59.867
  region net INPUT: 14.65,81.45 28.6,81.45 28.6,60 14.6,60
  region net NetC22_1: 79.053,95.302 82.228,95.302 82.228,93.016 80.958,93.016 80.958,93.27 80.196,94.032 79.053,94.032
  region net GND: 76.767,88.825 74.1,86.158 74.1,81.586 84.133,81.586 84.133,88.19 79.18,88.19 79.18,90.349 76.767,90.349
  region net +5V: 84.641,84.38 84.641,84.507 84.514,84.634 84.514,89.206 85.911,89.206 85.911,84.761 85.657,84.507 85.657,84.38
  region net SHUNT_NEG: 66.81,84.886 46.109,84.886 46.109,83.87 66.81,83.87
Bottom Layer:
  region net GND: 75.25,35.25 75.25,29 78.75,29 78.75,35.25

## Silkscreen, mask and mechanical layers (free items; w line width, h text height)
Top Overlay:
  drawing of 136 lines, arcs and shapes, not listed
  text "18VAC" at 47.25,96.213 h3
  text "R7..R16" at 46.254,81.354 h1.52
  text "+" at 18.45,67.7 h7
  text "GND /  / MOSI /  / +5V" at 7.7,32.045 h1.52
  text "RST /  / SCK /  / MISO" at 11.926,32.037 h1.52
  text "-  +" at 79.204,11.354 h2
  text "Display Data" at 16.1,4.386 h1.52
  text "5V CON RS R/W EN" at 34.15,4.39 h1.52
  text "5V   C    D  GND" at 64.5,4.39 h1.52
  text "5V   C    D  GND" at 53.15,4.34 h1.52
Mechanical 1:
  the board outline again, w0.254

## Text inside footprints (layer, text, board x,y; h text height)
J1: Top Overlay "1" at 6.25,30.78 h1.02 r90; Top Overlay "2" at 3.55,30.48 h1.02 r90; Top Overlay "5" at 6.25,39.72 h1.02 r90; Top Overlay "6" at 3.55,39.72 h1.02 r90
J3: Top Overlay "1" at 11.75,4.4 h1.02; Top Overlay "8" at 29.27,4.4 h1.02
J5: Top Overlay "1" at 33.25,4.4 h1.02; Top Overlay "8" at 50.77,4.4 h1.02